# Altium PCB VDMEDA_DisplayMaster.PcbDoc
Units mm, origin at the board's own origin, x right, y up, seen from the top; angles counter-clockwise.
Board outline 152.4 x 101.6 mm, 2 copper layers (Top Layer, Bottom Layer); 7 components, 22 nets, 63 pads, 32 vias.
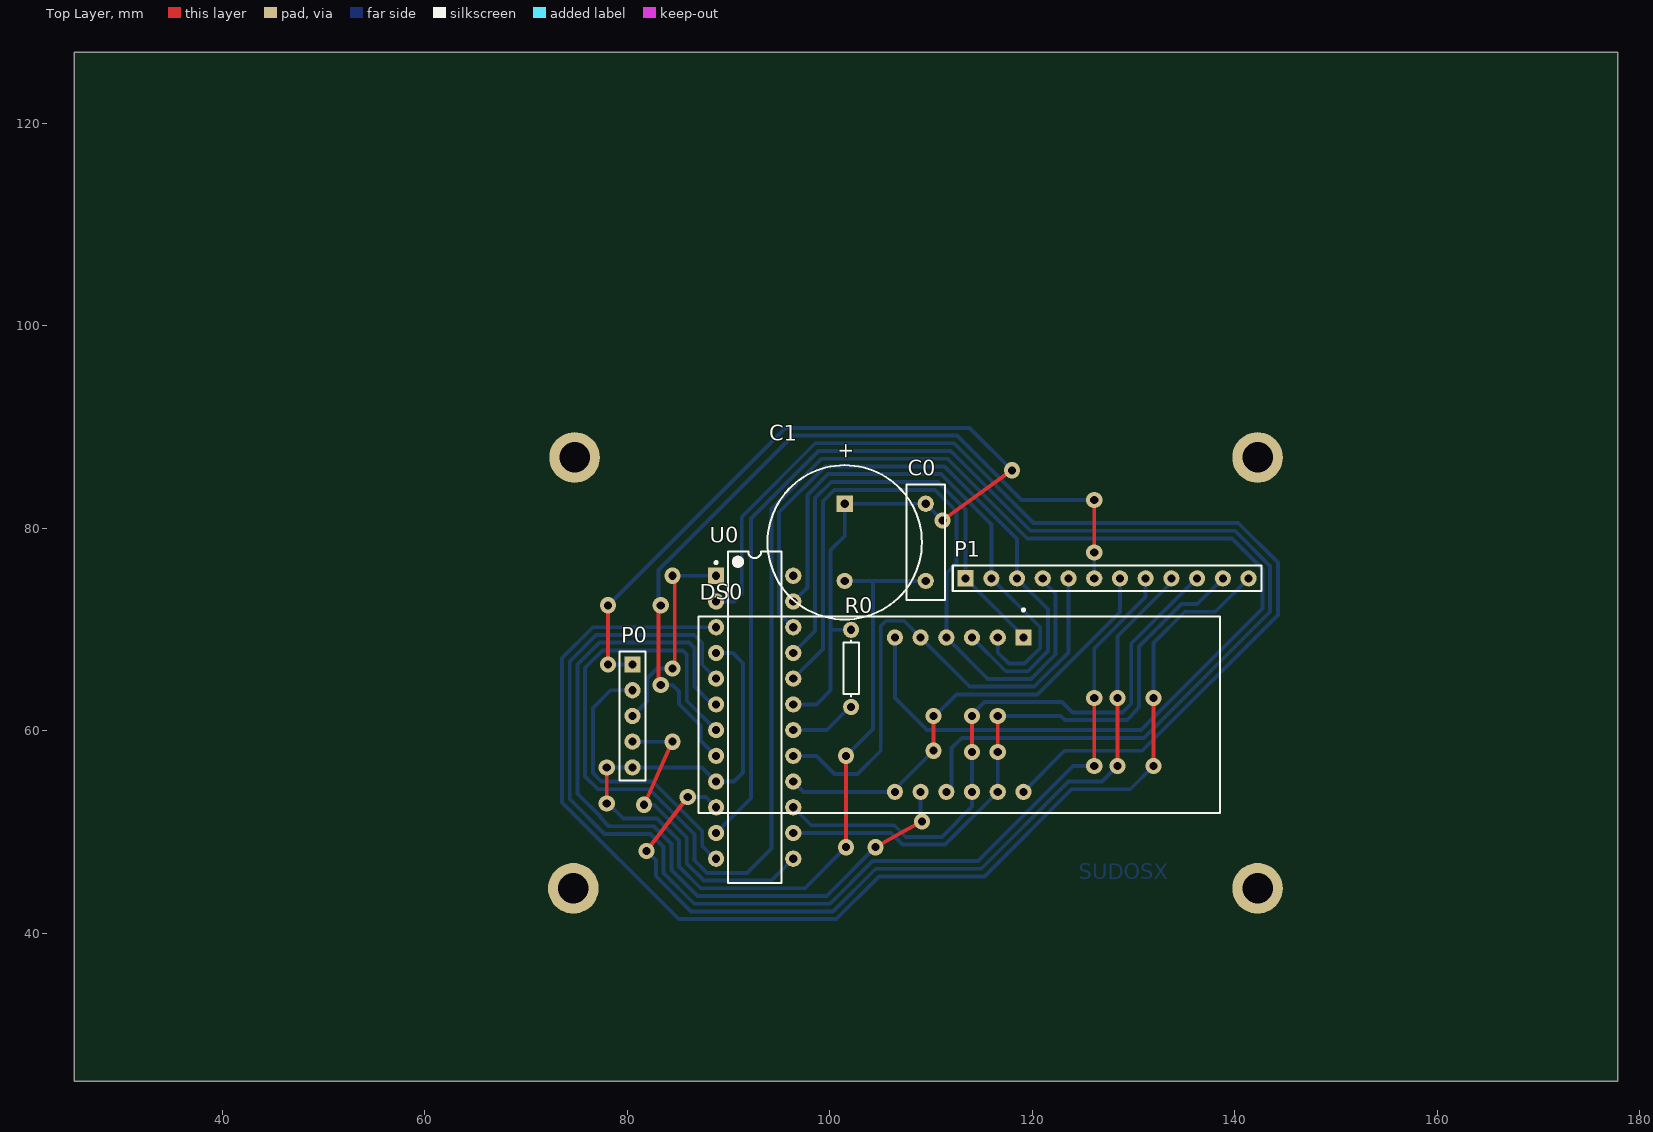
[diagram p0: Top Layer view]
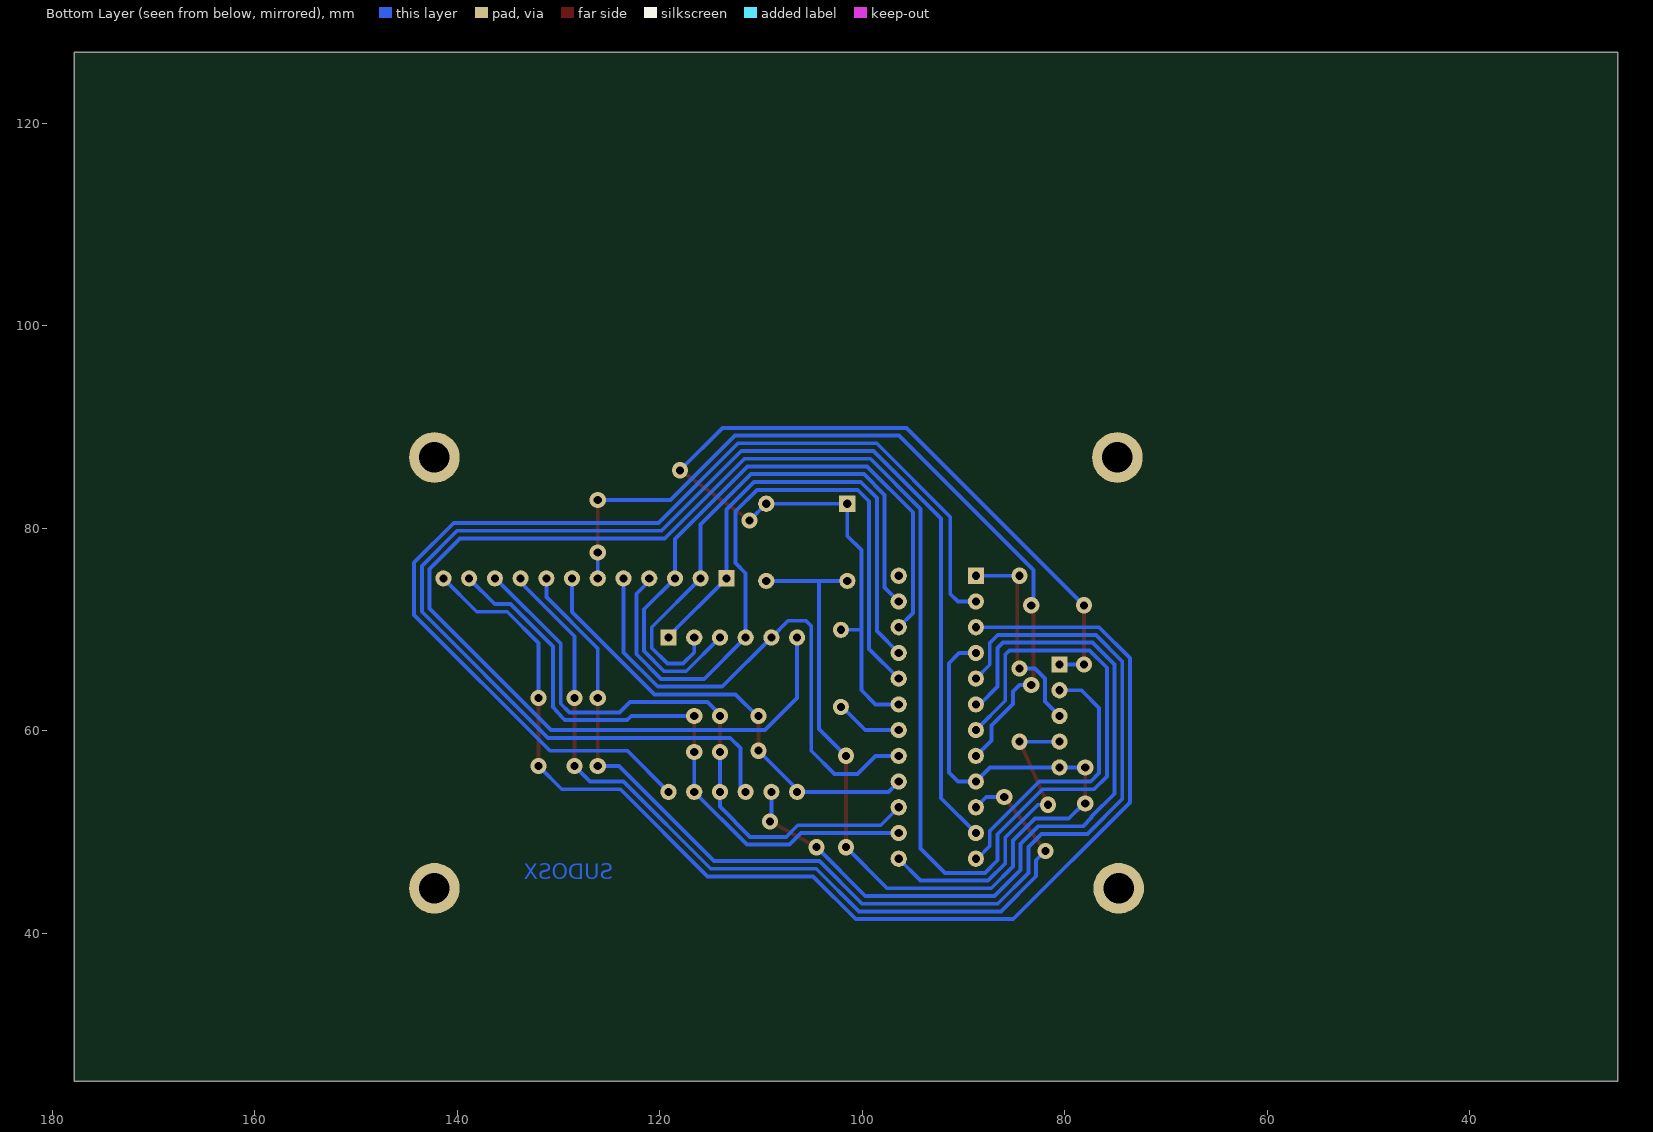
[diagram p1: Bottom Layer view, seen from below]

## Layer stack, top to bottom
Top Solder: solder mask 0.0102, Solder Resist, Dk 3.5
Top Layer: signal copper 0.0356
Dielectric 1: dielectric 0.32, FR-4, Dk 4.8
Bottom Layer: signal copper 0.0356
Bottom Solder: solder mask 0.0102, Solder Resist, Dk 3.5

## Board outline
25.4,25.4 177.8,25.4 177.8,127 25.4,127

## Design rules (kind name [scope] priority, off if disabled: settings)
Clearance [All] p1: gap=0.381
ComponentClearance [All] p1 off: gap=0.254 collisioncheckmode=3 verticalgap=0.254 showdistances=FALSE
Height [All] p1 off: minheight=0 maxheight=25.4 prefheight=12.7
PolygonConnect [All] p1: connectstyle=Relief reliefconductorwidth=0.254 reliefentries=4 polygonreliefangle="90 Angle" airgapwidth=0.254
RoomDefinition VDMEDA_Display1 [InComponentClass('VDMEDA_Display1')] p1: confinementstyle=ConfineIn formatcopy=TRUE lockcomponents=FALSE outline 70.612,40.259 145.796,40.259 145.796,91.186 70.612,91.186
RoutingVias [All] p1: holewidth=0.9 width=2.5 viastyle="Through Hole" minholewidth=0.9 minwidth=2.5 maxholewidth=0.9 maxwidth=2.5
SolderMaskExpansion [All] p1: expansion=0.102
UnpouredPolygon [All] p1: allowunpoured=FALSE
Width [All] p1: maxlimit=0.635 minlimit=0.381 preferedwidth=0.381
27 further rules are at their usual default settings.

## Components (designator, comment, footprint, x,y, rotation, side; value= is the part's Value field where it differs from the comment)
C0 "Cap" RAD-0.3 109.474,78.613 r90 top
C1 "Cap Pol1" RB7.6-15 101.473,78.613 r90 top
DS0 "HDSP-B03E" B-88 112.776,61.595 r180 top
P0 "Header 5" HDR1X5 80.518,66.548 r270 top
P1 "Header 12" HDR1X12 113.411,75.057 r0 top
R0 "Res1" AXIAL-0.3 102.108,66.167 r90 top
U0 "MAX7219CNG" NG24A 92.583,61.341 r0 top

## Footprints (in the part's own frame and the unit in brackets; to place one, negate y for a bottom-side part, rotate by r counter-clockwise, add the part's x,y. Pads: shape width x height; smd on the part's side, far side on the other; paste and mask are expansions set on the pad)
AXIAL-0.3 [mm] "Axial Device, Thru-Hole; 2 Leads; 0.3 in Pin Spacing"
  round 1.6 hole 0.8: 1(-3.81,0) 2(3.81,0)
  silkscreen extent -2.77,-0.76 2.77,0.76
B-88 [mm] "LED, 7-Segment Display, 14.22 mm, Four Digit, 88:88; 12 Leads; Row Space 15.24 mm; Pitch 2.54 mm"
  rect 1.6x1.6 hole 0.8: 1(-6.35,-7.62)
  round 1.6 hole 0.8: 2(-3.81,-7.62) 3(-1.27,-7.62) 4(1.27,-7.62) 5(3.81,-7.62) 6(6.35,-7.62) 7(6.35,7.62) 8(3.81,7.62) 9(1.27,7.62) 10(-1.27,7.62) 11(-3.81,7.62) 12(-6.35,7.62)
  silkscreen extent -25.75,-10.47 25.75,9.7
HDR1X5 [mm] "Connector; Header; 5 Position"
  rect 1.6x1.6 hole 0.8: 1(0,0)
  round 1.6 hole 0.8: 2(2.54,0) 3(5.08,0) 4(7.62,0) 5(10.16,0)
  silkscreen extent -1.27,-1.27 11.43,1.27
HDR1X12 [mm] "Connector; Header; 12 Position"
  rect 1.6x1.6 hole 0.8: 1(0,0)
  round 1.6 hole 0.8: 2(2.54,0) 3(5.08,0) 4(7.62,0) 5(10.16,0) 6(12.7,0) 7(15.24,0) 8(17.78,0) 9(20.32,0) 10(22.86,0) 11(25.4,0) 12(27.94,0)
  silkscreen extent -1.27,-1.27 29.21,1.27
NG24A [mm] "DIP, 24-Leads, Row Spacing 7.62mm, Pitch 2.54mm, Body 30.55x6.99mm"
  rect 1.6x1.6 hole 0.8: 1(-3.81,13.97)
  round 1.6 hole 0.8: 2(-3.81,11.43) 3(-3.81,8.89) 4(-3.81,6.35) 5(-3.81,3.81) 6(-3.81,1.27) 7(-3.81,-1.27) 8(-3.81,-3.81) 9(-3.81,-6.35) 10(-3.81,-8.89) 11(-3.81,-11.43) 12(-3.81,-13.97) 13(3.81,-13.97) 14(3.81,-11.43) 15(3.81,-8.89) 16(3.81,-6.35) 17(3.81,-3.81) 18(3.81,-1.27) 19(3.81,1.27) 20(3.81,3.81) 21(3.81,6.35) 22(3.81,8.89) 23(3.81,11.43) 24(3.81,13.97)
  silkscreen extent -3.93,-16.35 2.65,16.35, body extent -3.6,-16.32 3.6,16.32, height 5.08
RAD-0.3 [mm] "Radial Cap, Thru-Hole; 2 Leads; 0.3 in Pin Spacing"
  round 1.6 hole 0.8: 1(-3.81,0) 2(3.81,0)
  silkscreen extent -5.71,-1.91 5.71,1.91
RB7.6-15 [mm] "Polarized Capacitor (Radial); 2 Leads"
  rect 1.6x1.6 hole 0.8: 1(3.81,0)
  round 1.6 hole 0.8: 2(-3.81,0)
  silkscreen extent -7.62,-7.62 7.62,7.62

## Part data
C0: "Capacitor"
C1: "Polarized Capacitor (Radial)"
DS0: "14.22 mm GaP HER, Untinted, 88:88 4-Digit 7-Segment Display: CC, Gray Surface"
P0: "Header, 5-Pin"
P1: "Header, 12-Pin"
R0: "Resistor"
U0: "Serially Interfaced, 8-Digit LED Display Driver"

## Free pads (board coordinates)
  round 5 hole 3: 0(74.676,44.45) 0(74.803,86.995) 0(142.24,44.45) 0(142.24,86.995)

## Via types
v1: diameter 1.6, hole 0.8, Top Layer to Bottom Layer, 32 vias

## Nets (pads, with @x,y where several pads share a name; then routed paths per layer and width w, separated by ;. In a path a pad name is that pad's centre, name@x,y a point inside that pad or via, vN(x,y) a via of type N, cw(c..) or ccw(c..) an arc to the next point about the centre after c; other vN are vias at no path point)
5V: C0.2 C1.1 P0.1 R0.2 U0.19 | length 101.2
  Top Layer w0.381: v1(78.105,66.548) v1(78.105,72.39) ; v1(111.125,80.772) v1(117.983,85.725)
  Bottom Layer w0.381: v1(78.105,66.548) P0.1 ; v1(78.105,72.39) 95.631,89.916 113.792,89.916 v1(117.983,85.725) ; U0.19 98.679,62.611 100.076,64.008 100.076,69.977 ; R0.2 100.076,69.977 ; v1(111.125,80.772) C0.2 C1.1 101.473,79.248 100.076,77.851 100.076,69.977
GND: C0.1 C1.2 P0.5 U0.4 U0.9 | length 97.5
  Top Layer w0.381: v1@77.978,52.959 v1(77.978,56.388) v1@77.978,56.515 ; v1(101.6,48.514) v1(101.6,57.531)
  Bottom Layer w0.381: v1(77.978,52.832) 78.105,52.832 79.604,51.333 82.94,51.333 85.115,49.158 85.115,46.587 87.253,44.45 97.536,44.45 v1(101.6,48.514) ; v1(77.978,56.388) P0.5 87.376,56.388 U0.9 90.551,54.991 91.44,55.88 91.44,66.675 90.424,67.691 U0.4 ; C1.2 104.267,74.803 ; v1(101.6,57.531) 104.267,60.198 104.267,74.803 ; C0.1 104.267,74.803
NetDS0_1: DS0.1 P1.1 U0.21 | length 47.8
  Bottom Layer w0.381: U0.21 98.552,69.85 98.552,82.988 100.146,84.582 110.679,84.582 113.411,81.85 P1.1 119.126,69.342 DS0.1
NetDS0_2: DS0.2 P1.2 U0.23 | length 53.1
  Bottom Layer w0.381: U0.23 97.79,74.168 97.79,83.303 99.831,85.344 110.994,85.344 115.951,80.387 P1.2 120.777,70.231 120.777,68.188 119.239,66.65 117.689,66.65 116.586,67.753 DS0.2
NetDS0_3: DS0.3 P1.3 U0.22 | length 62.3
  Bottom Layer w0.381: U0.22 94.996,71.628 94.996,81.587 99.515,86.106 111.31,86.106 118.491,78.925 P1.3 121.539,72.009 121.539,67.872 119.554,65.888 117.373,65.888 DS0.3
NetDS0_4: DS0.4 P1.4 U0.20 | length 67.7
  Bottom Layer w0.381: U0.20 99.314,68.072 99.314,82.672 100.436,83.795 110.388,83.795 112.497,81.686 112.497,76.556 111.506,75.565 DS0.4 115.595,65.126 119.87,65.126 122.301,67.557 122.301,73.533 121.031,74.803 P1.4
NetDS0_5: DS0.5 P1.5 U0.17 | length 52.8
  Bottom Layer w0.381: U0.17 98.679,57.531 100.457,55.753 102.743,55.753 105.029,58.039 105.029,70.358 105.537,70.866 107.315,70.866 DS0.5 113.817,64.364 120.186,64.364 123.571,67.749 P1.5
NetDS0_6: DS0.6 U0.7 | length 196.2
  Bottom Layer w0.381: U0.7 85.877,62.967 85.877,67.539 85.471,67.945 77.562,67.945 75.844,66.227 75.844,55.504 77.12,54.229 82.2,54.229 86.639,49.789 86.639,47.219 87.884,45.974 91.821,45.974 94.234,48.387 94.234,81.903 99.199,86.868 111.626,86.868 119.5,78.994 139.7,78.994 142.723,75.971 142.723,72.076 130.718,60.071 109.601,60.071 106.426,63.246 DS0.6
NetDS0_7: DS0.7 P1.7 U0.16 | length 45.5
  Top Layer w0.381: v1(110.236,58.039) v1(110.236,61.468)
  Bottom Layer w0.381: U0.16 97.409,53.975 DS0.7 106.426,54.229 v1(110.236,58.039) ; v1(110.236,61.468) 110.363,61.468 112.497,63.602 120.501,63.602 128.651,71.751 P1.7
NetDS0_8: DS0.8 U0.6 | length 77.7
  Top Layer w0.381: v1(104.521,48.514) 107.493,50.165 108.521,50.736 v1(109.093,51.054)
  Bottom Layer w0.381: U0.6 88.392,62.611 86.639,64.364 86.639,68.174 86.106,68.707 77.247,68.707 75.082,66.543 75.082,53.788 77.343,51.527 77.343,51.435 78.207,50.571 82.624,50.571 84.353,48.842 84.353,46.272 86.937,43.688 99.695,43.688 v1(104.521,48.514) ; DS0.8@108.839,53.848 DS0.8 108.966,51.181 v1(109.093,51.054)
NetDS0_9: DS0.9 U0.11 | length 137.3
  Bottom Layer w0.381: U0.11 92.202,53.34 92.202,80.948 98.884,87.63 111.941,87.63 119.815,79.756 140.016,79.756 143.485,76.287 143.485,71.76 131.033,59.309 113.03,59.309 112.014,58.293 112.014,54.483 DS0.9
NetDS0_10: DS0.10 P1.10 U0.15 | length 61.3
  Top Layer w0.381: v1(114.046,57.912) v1(114.046,61.468)
  Bottom Layer w0.381: U0.15 98.171,50.673 106.361,50.673 107.504,49.53 111.063,49.53 114.046,52.513 DS0.10 v1(114.046,57.912) ; v1(114.046,61.468) 114.046,61.595 115.291,62.84 122.936,62.84 123.952,61.824 128.898,61.824 128.949,61.874 128.965,61.874 129.769,62.678 129.769,68.631 136.194,75.057 P1.10
NetDS0_11: DS0.11 P1.11 U0.14 | length 62
  Top Layer w0.381: v1(116.586,57.912) v1(116.586,61.468)
  Bottom Layer w0.381: U0.14 106.045,49.911 107.188,48.768 111.379,48.768 DS0.11 v1(116.586,57.912) ; v1(116.586,61.468) 122.809,61.468 123.215,61.062 129.357,61.062 129.588,61.293 130.531,62.362 130.531,68.315 134.74,72.524 136.278,72.524 P1.11
NetDS0_12: DS0.12 U0.2 | length 108.8
  Bottom Layer w0.381: U0.2 90.551,72.771 91.313,73.533 91.313,81.137 98.568,88.392 112.257,88.392 120.131,80.518 140.331,80.518 144.247,76.603 144.247,71.445 130.841,58.039 123.19,58.039 DS0.12
NetP0_2: P0.2 U0.12 | length 27.6
  Bottom Layer w0.381: P0.2 78.359,64.008 76.606,62.255 76.606,55.82 77.435,54.991 82.515,54.991 87.401,50.105 87.401,48.616 88.646,47.371 U0.12
NetP0_3: P0.3 U0.1 | length 20.4
  Top Layer w0.381: v1(84.455,66.167) 84.684,66.396 84.684,75.082 v1(84.455,75.311)
  Bottom Layer w0.381: P0.3 81.94,62.89 81.94,65.176 82.931,66.167 v1(84.455,66.167) ; v1@84.963,75.311 U0.1
NetP0_4: P0.4 U0.13 | length 31
  Top Layer w0.381: v1(81.661,52.705) v1(84.455,58.928)
  Bottom Layer w0.381: P0.4 v1(84.455,58.928) ; v1(81.661,52.705) 82.646,52.705 85.877,49.474 85.877,46.903 87.568,45.212 94.234,45.212 U0.13
NetP1_6: P1.6 U0.8 | length 81
  Top Layer w0.381: v1(83.312,64.516) 83.083,64.745 83.083,72.161 v1(83.312,72.39) ; v1(126.111,77.597) v1(126.111,82.804)
  Bottom Layer w0.381: v1(83.312,64.516) 84.48,64.516 85.115,63.881 85.115,62.651 87.249,60.517 87.249,59.055 U0.8 U0.8@88.773,57.023 ; v1(83.312,72.39) 83.083,72.619 83.083,75.879 96.358,89.154 112.572,89.154 118.922,82.804 v1(126.111,82.804) ; P1.6 v1(126.111,77.597)
NetP1_8: P1.8 U0.5 | length 115.4
  Top Layer w0.381: 126.111,57.404 126.111,62.865 126.365,63.119 126.238,63.246 v1(126.111,63.246)
  Bottom Layer w0.381: U0.5 87.401,66.523 87.401,68.682 86.614,69.469 76.931,69.469 74.32,66.858 74.32,53.253 77.764,49.809 82.309,49.809 83.591,48.527 83.591,45.956 86.621,42.926 100.011,42.926 104.227,47.142 114.641,47.142 124.014,56.515 v1(126.111,56.515) ; v1(126.111,63.246) 126.111,68.134 131.191,73.214 P1.8
NetP1_9: P1.9 U0.10 | length 85.6
  Top Layer w0.381: v1(81.915,48.133) v1(85.979,53.467) ; 128.397,57.404 v1(128.397,63.246)
  Bottom Layer w0.381: v1(81.915,48.133) 82.829,47.219 82.829,45.64 86.306,42.164 100.326,42.164 104.543,46.38 114.957,46.38 123.567,54.991 126.873,54.991 v1(128.397,56.515) ; v1(85.979,53.467) 87.757,53.467 U0.10 ; v1(128.397,63.246) 128.397,69.342 133.731,74.676 P1.9
NetP1_12: P1.12 U0.3 | length 124.3
  Top Layer w0.381: v1(131.953,56.515) v1(131.953,63.246)
  Bottom Layer w0.381: U0.3 76.616,70.231 73.558,67.174 73.558,52.934 85.09,41.402 100.642,41.402 104.858,45.618 115.272,45.618 123.883,54.229 129.667,54.229 v1(131.953,56.515) ; v1(131.953,63.246) 131.953,68.66 135.055,71.762 138.056,71.762 P1.12
NetR0_1: R0.1 U0.18 | length 6.2
  Bottom Layer w0.381: U0.18 99.695,60.071 R0.1@101.727,62.103
pads on no net: U0.24

## Other copper
Bottom Layer:
  text "SUDOSX" at 124.587,45.339 h1.52

## Silkscreen, mask and mechanical layers (free items; w line width, h text height)
Mechanical 15:
  lines w0.254: 70.358,40.386 70.358,91.313 145.796,91.313 145.796,40.132 145.542,40.386 70.358,40.386

## Text inside footprints (layer, text, board x,y; h text height)
C1: Top Overlay "+" at 102.21,86.745 h1.5 r90